# Altium PCB klor1_4.PcbDoc (part 3 of 3)
Units mm, origin at the board's own origin, x right, y up, seen from the top; angles counter-clockwise.
Board outline 323.11 x 118.19 mm, 2 copper layers (Top Layer, Bottom Layer); 176 components, 136 nets, 856 pads, 194 vias.
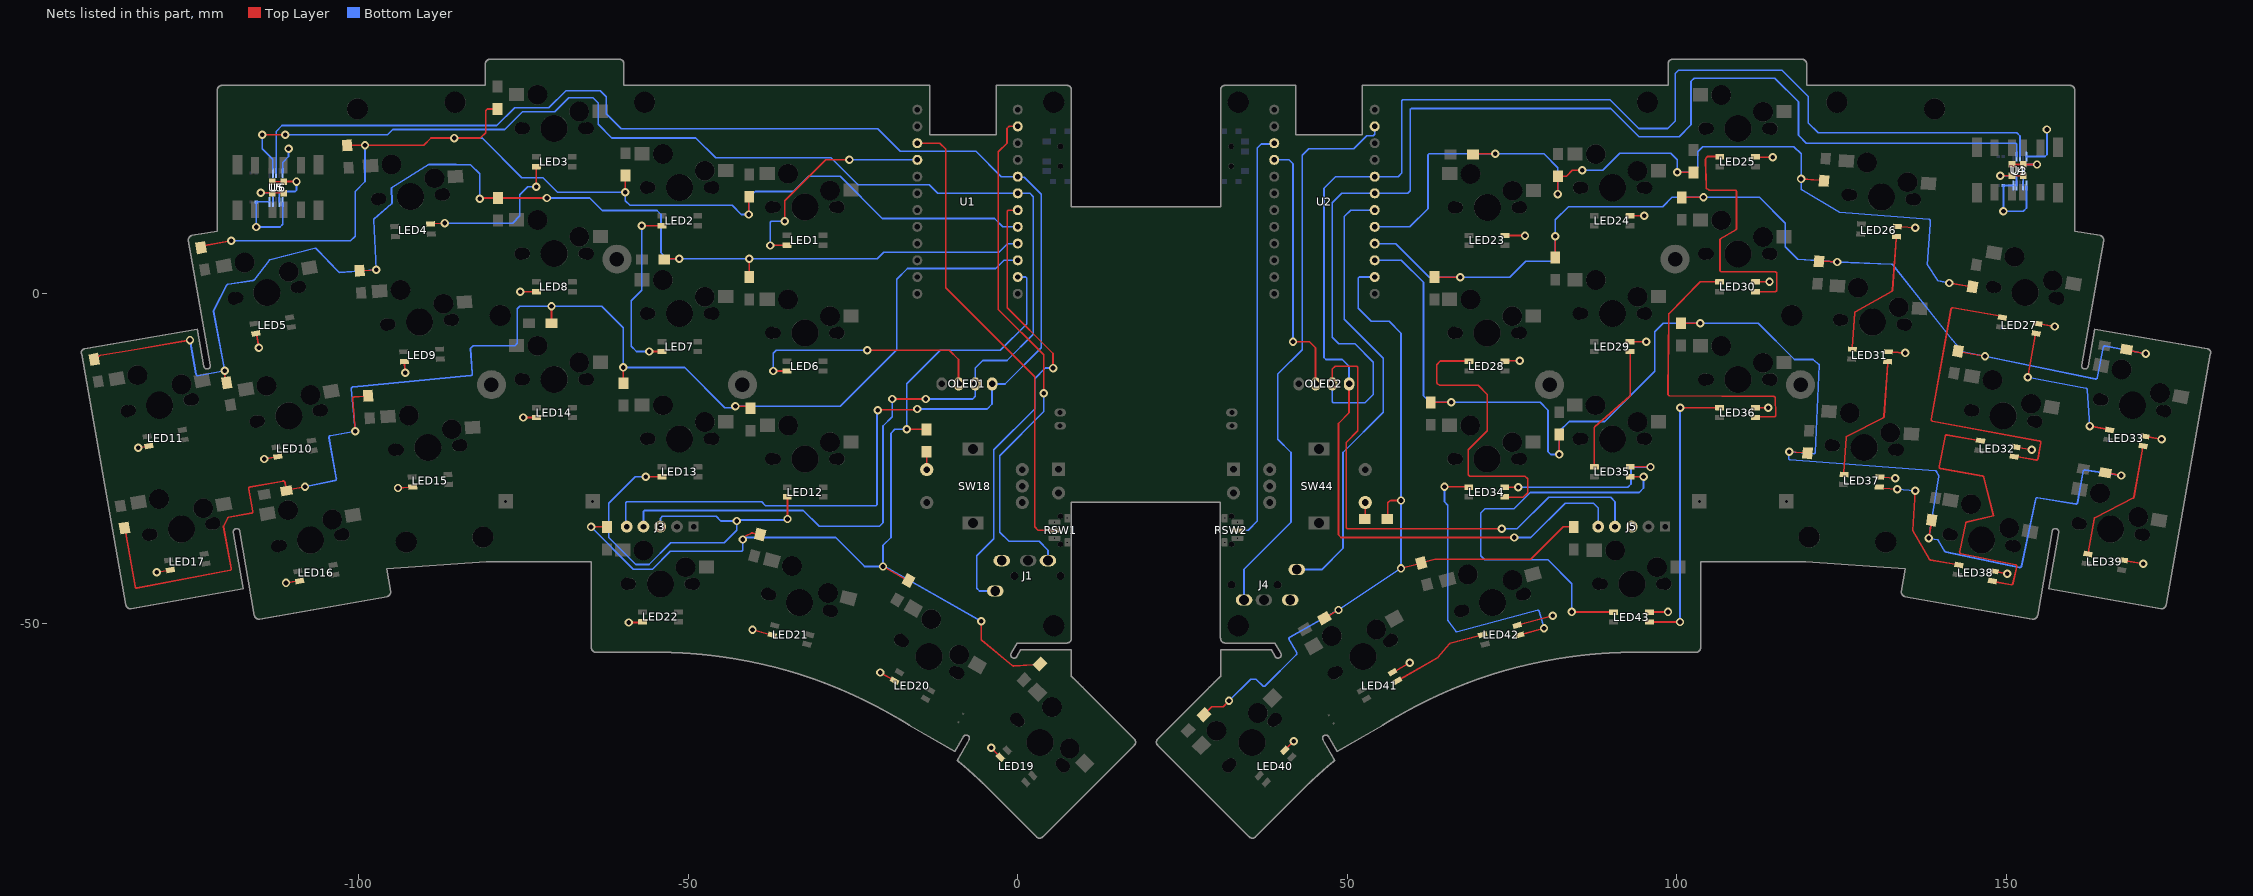
[diagram p3: the nets of this part, all layers, seen from the top]

## Via types
v1: diameter 1.27, hole 0.711, Top Layer to Bottom Layer, 194 vias

## Nets (pads, with @x,y where several pads share a name; then routed paths per layer and width w, separated by ;. In a path a pad name is that pad's centre, name@x,y a point inside that pad or via, vN(x,y) a via of type N, cw(c..) or ccw(c..) an arc to the next point about the centre after c; other vN are vias at no path point) (continued)
NetLED25_3: LED25.3 LED30.1 | length 39.6
  Top Layer w0.254: LED25.3@106.518,20.807 105.97,20.83 104.717,20.83 ccw(c104.717,20.576) 104.49,20.69 104.36,20.43 104.462,16.128 104.465,16.026 104.562,15.929 104.862,15.762 104.92,15.73 108.806,15.73 cw(c108.806,15.476) 109.06,15.477 ; 109.06,15.476 109.06,9.914 109.06,9.808 108.963,9.712 106.657,8.328 106.634,8.306 106.56,8.231 106.56,3.584 ccw(c106.814,3.584) 106.814,3.33 114.906,3.33 cw(c114.906,3.076) 115.16,3.076 115.16,0.584 cw(c114.906,0.584) 114.906,0.33 112.502,0.33 LED30.1@111.954,0.302
NetLED26_1: LED26.1 LED31.3 | length 20.5
  Top Layer w0.254: LED31.3@126.645,-8.411 126.643,-8.127 127.008,-2.909 127.015,-2.815 127.107,-2.723 132.629,0.377 132.654,0.402 ; 132.654,0.402 132.721,0.469 132.727,0.564 133.276,8.413 LED26.1@133.337,8.693
NetLED27_1: LED27.1 LED33.3 | length 24.7
  Top Layer w0.254: v1(153.26,-12.67) 154.387,-6.28 LED27.1@154.509,-6.014 ; v1(162.66,-20.07) 165.135,-20.506 LED33.3@165.663,-20.67
  Bottom Layer w0.254: v1(153.26,-12.67) 162.067,-14.334 cw(c162.02,-14.583) 162.274,-14.565 v1(162.66,-20.07)
NetLED27_3: LED27.3 LED32.1 | length 48.5
  Top Layer w0.254: 138.807,-19.316 cw(c138.855,-19.066) 138.605,-19.021 141.614,-2.324 cw(c141.864,-2.369) 141.908,-2.119 148.889,-3.35 LED27.3@149.403,-3.59 ; 138.808,-19.316 155.013,-22.324 cw(c154.967,-22.574) 155.218,-22.616 ; LED32.1@151.186,-24.712 151.738,-24.737 154.509,-25.226 ; 154.51,-25.226 ccw(c154.553,-24.976) 154.803,-25.019 155.217,-22.617
NetLED28_3: LED28.3 LED34.1 | length 44.8
  Top Layer w0.254: 63.569,-11.17 63.569,-10.761 64.122,-10.208 LED28.3@68.455,-10.208 ; 63.569,-11.165 63.587,-13.448 ccw(c63.841,-13.446) 63.689,-13.649 63.985,-13.87 69.86,-13.87 71.26,-15.27 71.26,-20.77 68.36,-23.67 68.36,-27.47 68.56,-27.67 76.96,-27.67 77.36,-28.07 77.36,-30.17 76.66,-30.87 74.436,-30.87 LED34.1@73.888,-30.823
NetLED29_1: LED29.1 LED35.3 | length 20
  Top Layer w0.254: LED35.3@87.485,-26.245 87.46,-25.962 87.46,-20.385 cw(c87.714,-20.385) 87.547,-20.194 92.872,-15.547 ; 92.873,-15.546 ccw(c92.705,-15.355) 92.959,-15.355 92.959,-9.036 LED29.1@92.918,-8.753
NetLED30_3: LED30.3 LED36.1 | length 44.3
  Top Layer w0.254: LED30.3@106.504,1.802 105.956,1.829 103.666,1.829 ccw(c103.666,1.575) 103.485,1.753 98.832,-2.997 ccw(c99.013,-3.175) 98.759,-3.172 98.662,-15.216 ccw(c98.916,-15.218) 98.914,-15.472 114.69,-15.571 114.794,-15.571 114.94,-15.717 114.996,-18.413 cw(c114.742,-18.416) 114.996,-18.416 114.996,-18.521 114.922,-18.596 114.847,-18.67 112.502,-18.67 LED36.1@111.954,-18.771
NetLED31_1: LED31.1 LED37.3 | length 20.7
  Top Layer w0.254: LED37.3@125.385,-27.441 125.349,-27.155 125.722,-21.806 125.729,-21.712 125.825,-21.616 131.339,-18.81 131.435,-18.715 131.442,-18.62 132.004,-10.573 LED31.1@131.977,-10.287
NetLED32_3: LED32.3 LED38.1 | length 47.4
  Top Layer w0.254: 140.014,-26.515 cw(c140.059,-26.265) 139.81,-26.216 140.712,-21.614 ; 140.015,-26.515 146.398,-27.641 cw(c146.354,-27.892) 146.6,-27.83 148.06,-33.67 144.016,-34.633 ccw(c144.075,-34.88) 143.827,-34.826 ; 140.712,-21.613 cw(c140.961,-21.663) 141.006,-21.412 145.537,-22.211 LED32.3@146.08,-22.288 ; 143.11,-39.421 cw(c143.162,-39.172) 142.913,-39.12 143.827,-34.827 ; 143.111,-39.421 151.404,-41.118 cw(c151.353,-41.367) 151.601,-41.423 ; LED38.1@147.899,-43.574 148.429,-43.724 150.723,-44.128 ccw(c150.767,-43.878) 151.015,-43.936 151.601,-41.424
NetLED33_1: LED33.1 LED39.3 | length 20.2
  Top Layer w0.254: LED39.3@162.383,-39.47 162.451,-39.195 163.339,-34.157 163.353,-34.078 163.437,-33.993 169.285,-30.972 169.369,-30.888 169.383,-30.809 170.695,-23.368 LED33.1@170.769,-23.094
NetLED34_3: LED34.3 LED42.1 | length 45.9
  Top Layer w0.254: v1(64.76,-29.27) 64.786,-29.296 68.412,-29.296 LED34.3@68.438,-29.323 ; LED42.1@76.179,-51.755 76.708,-51.614 v1(79.86,-50.77)
  Bottom Layer w0.254: v1(64.76,-29.27) 64.76,-31.57 65.26,-32.07 65.26,-49.487 ccw(c65.514,-49.487) 65.309,-49.637 66.437,-51.175 66.448,-51.19 66.536,-51.279 66.675,-51.279 78.831,-47.998 78.97,-47.998 79.044,-48.073 79.09,-48.119 79.109,-48.182 v1(79.86,-50.77)
NetLED35_1: LED35.1 LED43.3 | length 62.7
  Top Layer w0.254: v1(84.06,-48.27) 84.071,-48.281 90.407,-48.281 LED43.3@90.418,-48.293 ; LED35.1@92.935,-27.745 93.483,-27.77 v1(94.96,-27.77)
  Bottom Layer w0.254: v1(84.06,-48.27) 84.06,-43.97 80.46,-40.37 70.86,-40.37 70.26,-39.77 70.26,-33.27 70.91,-32.62 75.31,-32.62 77.781,-30.149 94.281,-30.149 94.96,-29.47 v1(94.96,-27.77)
NetLED36_3: LED36.3 LED43.1 | length 43.1
  Top Layer w0.254: LED43.1@95.868,-49.793 v1(100.483,-49.793) ; v1(100.505,-17.271) LED36.3@106.504,-17.271
  Bottom Layer w0.254: v1(100.483,-49.793) 100.483,-17.293 v1(100.505,-17.271)
NetLED37_1: LED37.1 LED38.3 | length 21.2
  Top Layer w0.254: LED37.1@130.717,-29.317 131.252,-29.516 v1(133.46,-29.67) ; v1(136.16,-29.87) 135.799,-35.938 138.301,-40.267 ccw(c138.521,-40.14) 138.476,-40.39 ; 138.477,-40.391 142.253,-41.056 LED38.3@142.793,-41.15
  Bottom Layer w0.254: v1(133.46,-29.67) v1(136.16,-29.87)
NetLED41_1: LED41.1 LED42.3 | length 15
  Top Layer w0.254: LED41.1@57.625,-58.722 58.1,-58.448 63.706,-55.212 63.736,-55.181 63.743,-55.174 65.515,-53.106 65.521,-53.099 65.576,-53.043 69.997,-51.859 LED42.3@70.526,-51.717
NetU3_7: U3.7 U4.1 U4.2 | length 8.9
  Top Layer w0.254: U4.2@150.86,19.63 U4.1@152.56,19.63 ; U4.1@152.56,19.63 v1(154.66,19.63)
  Bottom Layer w0.254: U3.7@152.56,16.43 152.56,17.02 152.568,17.028 152.568,19.238 152.96,19.63 v1(154.66,19.63)
NetU3_9: U3.9 U4.3 U4.4 | length 7.4
  Top Layer w0.254: v1(149.06,17.93) U4.3@150.86,17.93 U4.4@152.56,17.93
  Bottom Layer w0.254: v1(149.06,17.93) 151.36,17.93 151.544,17.746 151.544,16.446 U3.9@151.56,16.43
NetU5_7: U5.7 U6.1 U6.2 | length 9.2
  Top Layer w0.254: U6.2@-113.111,17.018 -111.411,17.018 -111.399,17.03 v1(-109.44,17.03)
  Bottom Layer w0.254: U5.7@-112.04,13.93 -112.04,14.52 -112.032,14.528 -112.032,15.381 -111.883,15.53 -109.64,15.53 -109.44,15.73 v1(-109.44,17.03)
NetU5_9: U5.9 U6.3 U6.4 | length 6.5
  Top Layer w0.254: v1(-114.84,15.33) -113.123,15.33 -113.111,15.318 U6.4@-111.411,15.318
  Bottom Layer w0.254: v1(-114.84,15.33) -113.205,15.33 -113.056,15.181 -113.056,14.528 -113.04,14.512 U5.9@-113.04,13.93
RESET: RSW1.2 U1.22 | length 70.8
  Top Layer w0.254: U1.22@-15.24,22.86 -11.84,22.86 -10.94,21.96 -10.94,0.93 2.56,-12.57 2.56,-35.37 3.07,-35.88 RSW1.2@5.57,-35.88
RESET_L: RSW2.2 U2.22 | length 63.1
  Bottom Layer w0.254: RSW2.2@33.35,-35.88 34.95,-35.88 36.36,-34.47 36.36,22.13 36.951,22.721 38.781,22.721 U2.22@38.92,22.86
row0: D1.1 D2.1 D3.1 D4.1 D5.1 U1.8 | length 168.9
  Top Layer w0.254: D5.1@-123.935,7.004 -123.359,7.321 v1(-119.34,8.03) ; D4.1@-101.759,22.526 v1(-99.04,22.526) -90.144,22.526 -89.04,23.63 v1(-85.492,23.63) -81.54,23.63 -80.74,24.43 -80.74,27.771 -80.481,28.03 D3.1@-78.94,28.03 ; v1(-59.54,15.43) D2.1@-59.54,17.93 ; v1(-40.84,12.03) -40.84,14.63 D1.1@-40.74,14.73
  Bottom Layer w0.254: v1@-119.64,8.03 -101.24,8.03 -100.54,8.73 -100.54,15.53 -99.04,17.03 v1(-99.04,22.526) ; v1(-85.492,23.63) -81.24,23.63 -75.24,17.63 -72.04,17.63 -69.84,15.43 v1(-59.54,15.43) -59.54,14.13 -58.84,13.43 -43.34,13.43 -41.94,12.03 v1(-40.84,12.03) -40.84,14.53 -39.84,15.53 -34.04,15.53 -31.74,17.83 -26.94,17.83 -20.54,11.43 -3.54,11.43 -2.27,10.16 U1.8@0,10.16
row0_L: D23.1 D24.1 D25.1 D26.1 D27.1 U2.8 | length 139.2
  Top Layer w0.254: D23.1@69.06,21.13 69.833,21.23 v1(72.46,21.23) ; v1(81.96,15.13) D24.1@81.96,17.83 83.26,17.83 84.16,18.73 v1(85.66,18.73) ; v1(100.06,18.43) D25.1@102.56,18.43 ; v1(118.86,17.43) 121.724,17.23 D26.1@122.341,17.134 ; v1(141.36,1.63) 144.244,1.122 D27.1@144.865,1.056
  Bottom Layer w0.254: U2.8@54.16,10.16 59.49,10.16 62.26,12.93 62.26,21.081 62.409,21.23 v1(72.46,21.23) 79.86,21.23 81.96,19.13 v1(81.96,15.13) ; v1(85.66,18.73) 88.76,18.73 91.36,21.33 99.06,21.33 100.06,20.33 v1(100.06,18.43) 102.36,18.43 103.16,19.23 103.16,21.53 103.96,22.33 117.76,22.33 118.86,21.23 v1(118.86,17.43) 118.861,15.835 ; 118.861,15.83 124.657,12.395 138.313,11.312 138.453,11.171 138.453,11.064 138.453,11.062 138.45,10.83 138.447,10.652 138.447,10.643 138.447,10.634 138.019,4.439 ; 138.019,4.433 139.618,2 v1(141.36,1.63)
row1: D6.1 D7.1 D8.1 D9.1 D10.1 D11.1 U1.9 | length 196.3
  Top Layer w0.254: D11.1@-140.126,-9.947 -139.557,-9.585 -139.16,-9.331 -134.038,-8.507 -126.44,-7.17 v1(-125.59,-7.02) ; v1@-120.475,-11.614 -120.274,-12.753 D10.1@-120.035,-13.496 ; D9.1@-99.859,3.526 -99.232,3.498 v1(-97.34,3.63) ; v1(-81.64,14.43) -81.54,14.53 D8.1@-78.84,14.53 v1(-71.44,14.53) ; D7.1@-53.64,5.23 -53.54,5.33 v1(-51.34,5.33) ; D6.1@-40.74,2.53 v1(-40.74,5.33)
  Bottom Layer w0.254: v1(-125.59,-7.02) -124.684,-12.217 ccw(c-124.434,-12.173) -124.388,-12.423 v1(-120.34,-11.67) -122.024,-2.657 ; -122.024,-2.656 cw(c-121.774,-2.61) -121.999,-2.492 -120,1.316 ; -119.999,1.317 cw(c-119.775,1.198) -119.813,1.449 -116.041,2.015 ; -116.04,2.015 ccw(c-116.078,2.266) -115.878,2.111 -113.593,5.061 ; -113.593,5.062 cw(c-113.392,4.906) -113.456,5.152 -106.683,6.893 cw(c-106.619,6.647) -106.437,6.824 -102.94,3.23 v1(-97.34,3.63) -97.734,11.205 ; -97.734,11.206 cw(c-97.48,11.218) -97.645,11.411 -95.033,13.65 ; -95.033,13.65 ccw(c-95.199,13.843) -94.945,13.853 -95.034,16.088 -89.34,19.63 -85.24,19.63 -83.039,19.595 -81.64,18.196 v1(-81.64,14.43) ; v1(-71.44,14.53) -64.94,14.53 -63.04,12.63 -54.74,12.63 -54.14,12.03 -54.14,6.23 -53.24,5.33 v1(-51.34,5.33) v1(-40.74,5.33) -21.34,5.33 -20.34,6.33 -2.84,6.33 -1.55,7.62 U1.9@0,7.62
row1_L: D28.1 D29.1 D30.1 D31.1 D32.1 D33.1 U2.9 | length 164.8
  Top Layer w0.254: D28.1@63.26,2.53 v1(67.16,2.53) ; D29.1@81.56,5.53 v1(81.56,8.73) ; D30.1@100.76,14.63 v1(104.06,14.63) ; D31.1@121.579,4.926 122.207,4.981 v1(124.36,4.83) ; D32.1@142.655,-8.696 143.26,-8.853 v1(146.76,-9.47) ; D33.1@168.234,-8.465 168.98,-8.686 v1(171.16,-9.07)
  Bottom Layer w0.254: U2.9@54.16,7.62 57.37,7.62 62.46,2.53 v1(67.16,2.53) 74.66,2.53 77.06,4.93 81.011,4.93 81.56,5.479 v1(81.56,8.73) 81.56,11.23 83.56,13.23 97.86,13.23 99.26,14.63 v1(104.06,14.63) 112.56,14.63 116.46,10.73 116.46,7.13 118.36,5.23 v1(124.36,4.83) 132.576,4.505 132.676,4.501 132.756,4.42 141.759,-6.917 141.763,-6.921 143.375,-8.793 v1(146.76,-9.47) 163.534,-12.924 163.665,-12.924 163.794,-12.794 163.809,-12.718 164.712,-8.117 cw(c164.961,-8.166) 165.007,-7.916 v1(171.16,-9.07)
row2: D12.1 D13.1 D14.1 D15.1 D16.1 D17.1 U1.10 | length 223.5
  Top Layer w0.254: D17.1@-135.545,-35.544 -135.358,-36.296 -133.924,-44.425 -133.91,-44.504 -133.779,-44.635 -133.65,-44.635 -119.54,-41.96 -119.463,-41.946 -119.333,-41.816 -119.333,-41.687 -120.516,-35.342 -120.516,-35.257 -120.488,-35.201 -119.863,-34.001 -119.845,-33.966 -119.76,-33.882 -116.195,-33.263 -116.064,-33.131 -116.064,-33.003 -116.068,-32.98 -116.693,-29.621 ; -116.694,-29.62 cw(c-116.444,-29.574) -116.489,-29.324 -111.49,-28.415 ; -111.489,-28.415 cw(c-111.444,-28.665) -111.194,-28.621 -111.081,-29.263 D16.1@-110.966,-29.875 -110.223,-29.637 v1(-108.14,-29.27) ; v1(-100.54,-20.87) -100.921,-15.922 cw(c-100.667,-15.902) -100.685,-15.649 -99.178,-15.544 D15.1@-98.559,-15.474 ; D14.1@-70.74,-4.47 v1(-70.74,-1.87) ; D13.1@-59.84,-13.57 v1(-59.84,-11.17) ; v1(-42.84,-17.07) -40.84,-17.07 D12.1@-40.54,-17.37
  Bottom Layer w0.254: v1(-108.14,-29.27) -103.582,-28.32 ; -103.581,-28.32 ccw(c-103.634,-28.072) -103.384,-28.027 -104.495,-21.821 cw(c-104.245,-21.776) -104.289,-21.526 v1(-100.54,-20.87) -101.118,-14.421 cw(c-100.865,-14.398) -100.889,-14.145 -82.987,-12.394 ; -82.986,-12.394 ccw(c-83.011,-12.141) -82.758,-12.123 -83.04,-8.27 -82.64,-7.87 -76.289,-7.87 -75.94,-7.521 -75.94,-2.27 -75.54,-1.87 v1(-70.74,-1.87) -63.14,-1.87 -59.84,-5.17 v1(-59.84,-11.17) -50.54,-11.17 -44.446,-17.264 -43.034,-17.264 v1(-42.84,-17.07) -26.94,-17.07 -18.34,-8.47 -18.34,2.23 -16.74,3.83 -3.34,3.83 -2.09,5.08 U1.10@0,5.08
row2_L: D34.1 D35.1 D36.1 D37.1 D38.1 D39.1 U2.10 | length 221.4
  Top Layer w0.254: D34.1@62.66,-16.47 63.283,-16.47 v1(65.76,-16.47) ; v1(82.16,-24.37) D35.1@82.16,-21.37 ; D36.1@100.66,-4.47 v1(103.56,-4.47) ; v1(117.06,-23.97) 119.22,-24.121 D37.1@119.841,-24.166 ; v1(138.226,-37.064) 138.57,-35.112 D38.1@138.665,-34.344 ; D39.1@165.034,-27.165 165.799,-27.277 v1(167.46,-27.57)
  Bottom Layer w0.254: U2.10@54.16,5.08 58.21,5.08 61.56,1.73 61.56,-15.47 62.56,-16.47 v1(65.76,-16.47) 79.26,-16.47 80.46,-17.67 80.46,-23.97 80.86,-24.37 v1(82.16,-24.37) 82.16,-20.87 83.66,-19.37 89.06,-19.37 96.66,-11.77 96.66,-5.77 97.96,-4.47 v1(103.56,-4.47) 112.36,-4.47 117.86,-9.97 120.66,-9.97 121.621,-10.773 ; 121.621,-10.767 121.007,-24.127 120.937,-24.197 120.863,-24.271 120.758,-24.271 120.747,-24.271 120.737,-24.27 v1(117.06,-23.97) 117.003,-24.945 117.003,-25.058 117.144,-25.199 139.216,-26.865 139.31,-26.872 139.402,-26.964 139.747,-27.597 139.747,-27.661 139.747,-27.682 139.744,-27.702 v1@138.218,-37.001 ; v1(138.226,-37.064) 139.512,-37.32 139.587,-37.335 139.663,-37.411 140.682,-39.082 140.756,-39.157 140.83,-39.172 152.012,-41.518 ccw(c152.064,-41.269) 152.312,-41.322 154.46,-31.144 154.476,-31.07 154.603,-30.942 154.729,-30.942 160.531,-31.893 160.551,-31.893 160.657,-31.893 160.731,-31.819 160.787,-31.762 160.801,-31.684 161.67,-26.856 161.801,-26.726 161.926,-26.726 161.945,-26.729 v1(167.46,-27.57)
row3: D18.1 D19.1 D20.1 D21.1 D22.1 U1.11 | length 155.7
  Top Layer w0.254: v1(-64.74,-35.37) D22.1@-62.34,-35.37 ; v1(-41.74,-37.286) -41.74,-36.97 -40.426,-36.313 cw(c-40.313,-36.54) -40.248,-36.295 -39.72,-36.436 D21.1@-39.1,-36.528 ; v1(-20.44,-41.37) -17.171,-43.258 D20.1@-16.59,-43.498 ; v1(-16.84,-20.57) D18.1@-13.84,-20.57 ; v1(-5.54,-49.67) -5.54,-52.501 -5.447,-52.593 -0.819,-56.405 ccw(c-0.657,-56.209) -0.657,-56.463 ccw(c-0.657,-56.209) -0.641,-56.463 2.375,-56.274 D19.1@3.362,-56.168
  Bottom Layer w0.254: v1(-64.74,-35.37) -58.34,-41.77 -55.432,-41.77 -52.732,-39.07 -41.889,-39.07 -41.74,-38.921 v1(-41.74,-37.286) -41.74,-36.97 -27.64,-36.97 -23.24,-41.37 v1(-20.44,-41.37) ; v1(-5.54,-49.67) -20.23,-41.37 v1(-20.44,-41.37) ; U1.11@0,2.54 1.203,2.54 1.352,2.391 1.352,-4.57 -2.648,-8.57 -11.74,-8.57 -16.84,-13.67 v1(-16.84,-20.57) -18.64,-20.57 -19.24,-21.17 -19.24,-36.97 -20.44,-38.17 v1(-20.44,-41.37)
row3_L: D40.1 D41.1 D42.1 D43.1 D44.1 U2.11 | length 128
  Top Layer w0.254: D40.1@28.262,-63.868 29.46,-62.67 31.16,-62.67 v1(32.06,-61.77) ; D41.1@46.532,-49.22 47.192,-48.817 v1(48.66,-47.97) ; D44.1@56.06,-34.17 56.155,-33.547 56.155,-31.801 cw(c56.409,-31.801) 56.256,-31.598 ; 56.257,-31.598 56.492,-31.421 cw(c56.645,-31.624) 56.645,-31.37 v1(58.16,-31.37) ; v1(58.16,-41.67) 60.624,-41.01 D42.1@61.22,-40.828 61.822,-40.667 63.302,-40.27 77.86,-40.27 82.76,-35.37 D43.1@84.36,-35.37
  Bottom Layer w0.254: v1(32.06,-61.77) 35.36,-58.47 36.16,-58.47 37.255,-59.565 37.465,-59.565 42.292,-54.738 42.332,-54.698 42.332,-54.431 41.146,-52.381 41.146,-52.208 41.245,-52.109 41.276,-52.091 v1(48.66,-47.97) v1(58.16,-41.67) v1(58.16,-31.37) 58.16,-5.97 56.36,-4.17 53.66,-4.17 51.67,-2.18 51.67,2.391 51.819,2.54 U2.11@54.16,2.54
RX: J1.3 U1.7 | length 70.2
  Top Layer w0.254: U1.7@0,12.7 -1.421,12.7 -1.57,12.551 -1.57,-2.14 5.36,-9.07 v1(5.36,-11.27)
  Bottom Layer w0.254: J1.3@-3.42,-45.095 -5.815,-45.095 -6.215,-44.695 -6.215,-39.745 -3.64,-37.17 -3.64,-23.67 2.56,-17.47 2.56,-12.87 4.16,-11.27 v1(5.36,-11.27)
RX_L: J4.3 U2.7 | length 68.7
  Bottom Layer w0.254: J4.3@42.34,-41.845 46.136,-41.845 49.36,-38.621 49.36,-24.07 55.46,-17.97 55.46,-9.77 49.56,-3.87 49.56,11.73 50.53,12.7 U2.7@54.16,12.7
SCL: J3.4 OLED1.3 U1.6 U5.2 | length 241.5
  Top Layer w0.254: v1(-114.64,24.13) v1(-111.14,24.13) ; v1(-19.04,-15.97) v1(-13.94,-15.97)
  Bottom Layer w0.254: v1(-114.64,24.13) -114.54,24.03 -114.624,23.946 -114.624,22.014 -113.04,20.43 U5.2@-113.04,18.931 ; v1(-111.14,24.13) -95.64,24.13 -94.84,24.93 -77.84,24.93 -75.14,27.63 -70.24,27.63 -68.14,29.73 -64.44,29.73 -63.674,28.964 -63.674,25.712 -61.591,23.63 -48.84,23.63 -45.84,20.63 -28.34,20.63 -24.24,16.53 -13.44,16.53 -12.15,15.24 U1.6@0,15.24 1.85,15.24 2.36,14.73 2.36,-6.121 -1.638,-10.12 -5.29,-10.12 -6.439,-11.269 OLED1.3@-6.439,-13.675 -6.439,-15.569 -6.84,-15.97 v1(-13.94,-15.97) ; J3.4@-56.79,-35.32 -56.79,-33.018 -56.641,-32.869 -32.541,-32.869 -30.14,-35.27 -20.989,-35.27 -20.44,-34.721 -20.44,-20.07 -19.04,-18.67 v1(-19.04,-15.97)
SCL_L: J5.4 OLED2.3 U2.6 U3.2 | length 256.2
  Top Layer w0.254: OLED2.3@47.729,-13.675 47.729,-11.401 48.155,-10.975 51.416,-10.975 51.565,-11.124 51.565,-20.765 49.86,-22.57 49.86,-35.521 50.009,-35.67 v1(73.46,-35.67)
  Bottom Layer w0.254: OLED2.3@47.729,-13.675 47.729,-16.39 47.878,-16.539 52.691,-16.539 53.96,-15.27 53.96,-10.37 51.16,-7.57 48.729,-7.57 47.729,-6.57 47.729,13.799 49.17,15.24 U2.6@54.16,15.24 59.17,15.24 59.56,15.63 59.56,27.981 59.709,28.13 89.96,28.13 94.26,23.83 100.36,23.83 102.16,25.63 102.16,32.23 102.66,32.73 114.86,32.73 118.46,29.13 118.46,24.038 119.66,22.838 151.411,22.838 151.56,22.689 U3.2@151.56,20.83 ; v1(73.46,-35.67) 75.76,-35.67 80.56,-30.87 89.96,-30.87 90.62,-31.53 J5.4@90.62,-35.32
SDA: J3.5 OLED1.4 U1.5 U5.3 | length 243.3
  Top Layer w0.254: v1(-21.24,-17.67) -21.145,-17.575 -15.336,-17.575 v1(-15.241,-17.481)
  Bottom Layer w0.254: U5.3@-112.54,18.33 -112.532,18.338 -112.532,24.638 -111.64,25.53 -109.04,25.53 -79.04,25.53 -76.34,28.23 -71.14,28.23 -68.545,30.825 -63.34,30.825 -62.44,29.925 -62.44,27.33 -60.14,25.03 -21.24,25.03 -17.84,21.63 -6.34,21.63 -2.49,17.78 U1.5@0,17.78 0.084,17.696 0.994,17.696 3.56,15.13 3.56,-8.17 -1.945,-13.675 OLED1.4@-3.899,-13.675 -3.899,-16.729 -4.64,-17.47 -15.231,-17.47 v1(-15.241,-17.481) ; J3.5@-59.33,-35.32 -59.485,-35.165 -59.485,-31.719 -59.336,-31.57 -38.84,-31.57 -38.264,-32.146 -21.516,-32.146 -21.348,-31.978 -21.348,-17.778 v1(-21.24,-17.67)
SDA_L: J5.5 OLED2.4 U2.5 U3.3 | length 238
  Top Layer w0.254: OLED2.4@50.269,-13.675 50.269,-18.061 48.66,-19.67 48.66,-36.57 49.06,-36.97 v1(75.323,-36.97)
  Bottom Layer w0.254: OLED2.4@50.269,-13.675 50.269,-10.979 49.26,-9.97 46.76,-9.97 46.46,-9.67 46.46,16.03 48.21,17.78 U2.5@54.16,17.78 57.71,17.78 58.26,18.33 58.26,29.281 58.409,29.43 89.86,29.43 94.21,25.08 98.61,25.08 99.76,26.23 99.76,33.43 100.26,33.93 115.96,33.93 119.96,29.93 119.96,25.93 121.46,24.43 151.582,24.43 152.068,23.944 U3.3@152.068,20.83 ; v1(75.323,-36.97) 77.86,-36.97 83.06,-31.77 87.36,-31.77 88.08,-32.49 J5.5@88.08,-35.32
SW18B: D18.2 SW18.S2 | length 2.7
  Top Layer w0.254: D18.2@-13.84,-23.97 -13.81,-24.743 SW18.S2@-13.81,-26.67
SW18B_L: D44.2 SW44.S2 | length 2.5
  Top Layer w0.254: D44.2@52.66,-34.17 52.73,-33.547 SW44.S2@52.73,-31.67
TX: J1.4 U1.2 | length 79.2
  Top Layer w0.254: U1.2@0,25.4 -1.31,25.4 -1.64,25.07 -1.64,22.83 -2.94,21.53 -2.94,-2.37 3.96,-9.27 v1(3.96,-15.07)
  Bottom Layer w0.254: v1(3.96,-15.07) 3.96,-17.87 -2.74,-24.57 -2.74,-36.17 -1.34,-37.57 3.26,-37.57 4.58,-38.89 J1.4@4.58,-40.495
TX_L: J4.4 U2.2 | length 86.3
  Bottom Layer w0.254: J4.4@34.34,-46.445 34.34,-41.79 41.46,-34.67 41.46,-24.07 39.46,-22.07 39.46,-12.17 43.16,-8.47 43.16,21.03 44.16,22.03 50.96,22.03 52.933,24.003 53.933,24.003 54.16,24.23 U2.2@54.16,25.4
VCC: C4.1 J1.1 J3.3 LED1.4 LED2.4 LED3.4 LED4.4 LED5.4 LED6.4 LED7.4 LED8.4 LED9.4 LED10.4 LED11.4 LED12.4 LED13.4 LED14.4 LED15.4 LED16.4 LED17.4 LED19.4 LED20.4 LED21.4 LED22.4 OLED1.2 U1.21 U5.5 U5.6 U5.10 | length 231.3
  Top Layer w0.254: v1(-133.44,-23.37) -132.39,-23.185 LED11.4@-131.849,-23.094 ; v1(-130.64,-42.27) -129.107,-42 LED17.4@-128.569,-41.894 ; LED5.4@-115.589,-6.014 -115.473,-6.281 v1(-115.14,-8.17) ; v1(-114.34,-25.07) -112.807,-24.8 LED10.4@-112.266,-24.712 ; v1(-111.04,-43.87) -109.531,-43.604 LED16.4@-108.979,-43.574 ; v1(-94.04,-29.47) -92.344,-29.351 LED15.4@-91.797,-29.317 ; LED9.4@-93.057,-10.287 -93.038,-10.57 v1(-92.94,-11.97) ; LED4.4@-89.085,10.569 -88.539,10.618 v1(-86.94,10.73) ; v1(-75.468,0.302) LED8.4@-73.034,0.302 ; v1(-75.039,-18.771) LED14.4@-73.034,-18.771 ; LED3.4@-73.048,19.307 -73.04,19.299 v1(-73.04,16.23) ; v1(-59.04,-49.87) -57.47,-49.87 LED22.4@-56.922,-49.78 ; v1(-57.04,10.33) -57.039,10.329 -54.009,10.329 LED2.4@-54.008,10.327 ; v1@-56.44,-27.77 LED13.4@-53.984,-27.771 ; v1(-55.923,-8.753) LED7.4@-53.998,-8.753 ; v1(-40.24,-50.97) -37.779,-51.629 LED21.4@-37.248,-51.766 ; v1(-37.54,7.33) -37.512,7.358 -35.015,7.358 LED1.4@-34.987,7.386 ; v1(-37.102,-11.708) LED6.4@-34.985,-11.708 ; v1(-35.34,11.03) -35.34,14.13 -29.14,20.33 v1(-25.54,20.33) ; LED12.4@-34.968,-30.823 -34.94,-30.851 v1(-34.94,-34.17) ; v1(-22.84,-8.57) -10.379,-8.57 -8.979,-9.97 OLED1.2@-8.979,-13.675 ; v1(-20.84,-57.47) -20.341,-57.769 ccw(c-20.211,-57.551) -20.338,-57.771 -19.176,-58.442 LED20.4@-18.705,-58.722 ; v1(-4.04,-68.87) -3.011,-69.899 LED19.4@-2.63,-70.292
  Bottom Layer w0.254: U5.10@-113.56,13.968 -115.502,13.968 C4.1@-115.54,13.93 -115.54,10.63 v1(-115.54,10.13) -111.94,10.13 -111.54,10.53 U5.6@-111.54,13.83 ; U5.5@-111.54,18.33 -111.54,19.93 -110.64,20.83 v1(-110.64,22.03) ; v1(-86.94,10.73) -76.64,10.73 -75.54,11.83 -75.54,15.03 -74.34,16.23 v1(-73.04,16.23) ; v1(-57.04,10.33) -57.04,0.53 -58.64,-1.07 -58.64,-7.97 -57.857,-8.753 v1(-55.923,-8.753) ; v1(-56.44,-27.77) -58.04,-27.77 -62.04,-31.77 -62.04,-36.97 -57.94,-41.07 -55.94,-41.07 -52.64,-37.77 -44.54,-37.77 -42.64,-35.87 v1(-42.64,-34.47) ; J3.3@-54.25,-35.32 -54.209,-35.279 -54.209,-34.039 -53.94,-33.77 -45.74,-33.77 -45.04,-34.47 v1(-42.64,-34.47) ; v1(-37.54,7.33) -37.54,10.881 -37.391,11.03 v1(-35.34,11.03) ; v1(-37.102,-11.708) -37.102,-9.032 -36.64,-8.57 v1(-22.84,-8.57) ; v1(-34.94,-34.17) -35.09,-34.32 -42.49,-34.32 v1(-42.64,-34.47) ; v1(-25.54,20.33) -25.53,20.32 U1.21@-15.24,20.32
VCC_L: C2.1 J4.1 J5.3 LED23.4 LED24.4 LED25.4 LED26.4 LED27.4 LED28.4 LED29.4 LED30.4 LED31.4 LED32.4 LED33.4 LED34.4 LED35.4 LED36.4 LED37.4 LED38.4 LED39.4 LED40.4 LED41.4 LED42.4 LED43.4 OLED2.2 U2.21 U3.5 U3.6 U3.10 | length 136.8
  Top Layer w0.254: LED40.4@40.489,-69.231 40.881,-68.849 v1(41.86,-67.87) ; v1(41.76,-7.27) 44.26,-7.27 45.189,-8.199 OLED2.2@45.189,-13.675 ; LED41.4@56.875,-57.423 57.367,-57.179 v1(59.46,-55.97) ; LED34.4@73.888,-29.323 73.912,-29.346 75.936,-29.346 v1(75.96,-29.37) ; LED28.4@73.905,-10.208 74.453,-10.17 v1(76.16,-10.17) ; LED23.4@73.928,8.847 73.937,8.839 76.951,8.839 v1(76.96,8.83) ; LED42.4@75.791,-50.307 76.321,-50.167 v1(81.16,-48.87) ; LED29.4@92.918,-7.253 92.927,-7.261 95.351,-7.261 v1(95.36,-7.27) ; LED24.4@92.928,11.827 93.476,11.83 v1(95.06,11.83) ; LED35.4@92.935,-26.245 95.985,-26.245 v1(96.01,-26.27) ; LED43.4@95.868,-48.293 96.416,-48.27 v1(98.66,-48.27) ; LED36.4@111.954,-17.271 112.502,-17.27 v1(113.86,-17.27) ; LED30.4@111.954,1.802 112.502,1.83 v1(114.06,1.83) ; LED25.4@111.968,20.807 112.516,20.73 v1(114.56,20.73) ; LED37.4@130.821,-27.821 131.369,-27.845 v1(133.16,-27.97) ; LED31.4@132.081,-8.791 132.628,-8.828 v1(134.66,-8.97) ; LED26.4@133.441,10.189 133.99,10.182 v1(136.16,10.03) ; LED38.4@148.16,-42.097 148.696,-42.212 v1(150.16,-42.47) ; LED32.4@151.447,-23.234 151.985,-23.339 v1(153.86,-23.67) ; LED27.4@154.77,-4.537 155.314,-4.609 v1(157.36,-4.97) ; LED39.4@167.75,-40.417 168.286,-40.534 v1(170.76,-40.97) ; LED33.4@171.03,-21.617 171.568,-21.719 v1(173.56,-22.07)
  Bottom Layer w0.254: U2.21@38.92,20.32 41.17,20.32 41.76,19.73 v1(41.76,-7.27) ; v1(75.96,-29.37) 92.56,-29.37 93.06,-28.87 93.06,-26.47 93.26,-26.27 v1(96.01,-26.27) ; U3.10@150.998,16.43 C2.1@149.56,16.43 v1(149.56,12.53) 152.56,12.53 153.06,13.03 U3.6@153.06,16.33 ; U3.5@153.06,20.83 155.86,20.83 156.16,21.13 v1(156.16,24.93)
pads on no net: J1.Un3 J1.Un4 J3.1 J4.Un3 J4.Un4 J5.1 LED17.1 LED39.1 MH1.Un1 MH2.Un1 MH3.Un1 MH4.Un1 MH5.Un1 MH6.Un1 MH7.Un1 MH8.Un1 MH10.Un1 MH11.Un1 MH12.Un1 MH13.Un1 MH14.Un1 MH15.Un1 MH16.Un1 MH17.Un1 PSW1. PSW1.1 PSW1.4_1 PSW1.4_2 PSW1.4_3 PSW1.4_4 PSW2. PSW2.1 PSW2.4_1 PSW2.4_2 PSW2.4_3 PSW2.4_4 RSW1.MP RSW1.Un1 RSW1.Un2 RSW2.MP RSW2.Un1 RSW2.Un2 SW1. SW2. SW3. SW4. SW5. SW6. SW7. SW8. SW9. SW10. SW11. SW12. SW13. SW14. SW15. SW16. SW17. SW18.MP SW19. SW20. SW21. SW22. SW23. SW24. SW25. SW26. SW27. SW28. SW29. SW30. SW31. SW32. SW33. SW34. SW35. SW36. SW37. SW38. SW39. SW40. SW41. SW42. SW43. SW44.MP TP1.1 TP2.1

## Polygon pours and split planes (outlines as drawn)
GND_R on Top Layer "F.Cu-" (solid, remove dead copper, pour order 2): -81.62,32.48 -122.47,32.605 -122.495,10.33 -127.17,9.53 -124.645,-4.37 -143.145,-7.67 -135.745,-48.945 -117.32,-45.47 -116.42,-50.495 -94.095,-46.395 -94.795,-42.52 -80.795,-41.42 -65.545,-41.47 -65.32,-55.395 -55.17,-55.37 -46.87,-55.72 -39.22,-57.02 -29.17,-60.12 -19.67,-64.645 -10.17,-70.37 -10.27,-70.92 3.23,-84.02 19.255,-67.87 7.871,-56.624 7.846,32.351 -3.795,32.305 -3.82,24.955 -12.47,24.93 -12.47,32.305 -59.02,32.455 -59.045,36.23 -81.595,36.23
GND_l on Top Layer "F.Cu-" (solid, remove dead copper, pour order 14): 120.54,32.48 161.39,32.605 161.415,10.33 166.09,9.53 163.565,-4.37 182.065,-7.67 174.665,-48.945 156.24,-45.47 155.34,-50.495 133.015,-46.395 133.715,-42.52 119.715,-41.42 104.465,-41.47 104.24,-55.395 94.09,-55.37 85.79,-55.72 78.14,-57.02 68.09,-60.12 58.59,-64.645 49.09,-70.37 49.19,-70.92 35.69,-84.02 19.665,-67.87 31.049,-56.624 31.074,32.351 42.715,32.305 42.74,24.955 51.39,24.93 51.39,32.305 97.94,32.455 97.965,36.23 120.515,36.23
VCC on Bottom Layer "F.Cu-" (solid, remove dead copper, pour order 12): -81.62,32.48 -122.47,32.605 -122.495,10.33 -127.17,9.53 -124.645,-4.37 -143.145,-7.67 -135.745,-48.945 -117.32,-45.47 -116.42,-50.495 -94.095,-46.395 -94.795,-42.52 -80.795,-41.42 -65.545,-41.47 -65.32,-55.395 -55.17,-55.37 -46.87,-55.72 -39.22,-57.02 -29.17,-60.12 -19.67,-64.645 -10.17,-70.37 -10.27,-70.92 3.23,-84.02 19.255,-67.87 7.972,-56.723 7.947,32.352 -3.795,32.305 -3.82,24.955 -12.47,24.93 -12.47,32.305 -59.02,32.455 -59.045,36.23 -81.595,36.23
VCC_L on Bottom Layer "F.Cu-" (solid, remove dead copper, pour order 13): 120.54,32.48 161.39,32.605 161.415,10.33 166.09,9.53 163.565,-4.37 182.065,-7.67 174.665,-48.945 156.24,-45.47 155.34,-50.495 133.015,-46.395 133.715,-42.52 119.715,-41.42 104.465,-41.47 104.24,-55.395 94.09,-55.37 85.79,-55.72 78.14,-57.02 68.09,-60.12 58.59,-64.645 49.09,-70.37 49.19,-70.92 35.69,-84.02 19.665,-67.87 30.948,-56.723 30.973,32.352 42.715,32.305 42.74,24.955 51.39,24.93 51.39,32.305 97.94,32.455 97.965,36.23 120.515,36.23

## Silkscreen, mask and mechanical layers (free items; w line width, h text height)
Top Overlay:
  drawing of 23 lines, arcs and shapes, not listed
  text "BATT+--" at -18.219,27.909 h0.6
  text "--LED" at 1.583,27.72 h0.6
  text "--LED" at 55.983,26.62 h0.6
  text "BATT+--" at 38.481,26.609 h0.6
  text "GND--" at -17.844,25.366 h0.6
  text "--TX" at 1.583,25.18 h0.6
  text "--TX" at 55.983,24.08 h0.6
  text "GND--" at 38.856,24.066 h0.6
  text "RST--" at -17.686,22.826 h0.6
  text "--GND" at 1.583,22.636 h0.6
  text "RST--" at 39.014,21.526 h0.6
  text "--GND" at 55.983,21.536 h0.6
  text "VCC--" at -17.727,20.286 h0.6
  text "--GND" at 1.583,20.096 h0.6
  text "VCC--" at 38.973,18.986 h0.6
  text "--GND" at 55.983,18.996 h0.6
  text "ENC A--" at -18.105,17.746 h0.6
  text "--SDA" at 1.583,17.556 h0.6
  text "ENC A--" at 38.595,16.446 h0.6
  text "--SDA" at 55.983,16.456 h0.6
  text "ENC B--" at -18.12,15.206 h0.6
  text "--SCL" at 1.583,15.016 h0.6
  text "ENC B--" at 38.58,13.906 h0.6
  text "--SCL" at 55.983,13.916 h0.6
  text "COL0--" at -17.938,12.665 h0.6
  text "--RX" at 1.583,12.48 h0.6
  text "--RX" at 55.983,11.38 h0.6
  text "COL0--" at 38.762,11.365 h0.6
  text "COL1--" at -17.943,10.126 h0.6
  text "--ROW0" at 1.583,9.935 h0.6
  text "COL1--" at 38.757,8.826 h0.6
  text "--ROW0" at 55.983,8.835 h0.6
  text "COL2--" at -17.938,7.586 h0.6
  text "--ROW1" at 1.583,7.396 h0.6
  text "COL2--" at 38.762,6.286 h0.6
  text "--ROW1" at 55.983,6.296 h0.6
  text "MOUNT MCU ON BOTTOM / COMPONENTS FACING PCB" at -7.647,6.23 h0.8 r90
  text "MOUNT MCU ON BOTTOM / COMPONENTS FACING PCB" at 47.663,6.18 h0.8 r90
  text "TENTING / PUCK" at 95.689,5.532 h0.8
  text "COL3--" at -17.938,5.045 h0.6
  text "--ROW2" at 1.583,4.856 h0.6
  text "COL3--" at 38.762,3.745 h0.6
  text "--ROW2" at 55.983,3.756 h0.6
  text "COL4--" at -17.938,2.506 h0.6
  text "--ROW3" at 1.583,2.315 h0.6
  text "TENTING / PUCK" at -44.24,2.13 h0.8
  text "COL4--" at 38.762,1.206 h0.6
  text "--ROW3" at 55.983,1.215 h0.6
  text "COL5--" at -17.938,-0.035 h0.6
  text "--AUDIO" at 1.583,-0.224 h0.6
  text "COL5--" at 38.762,-1.335 h0.6
  text "--AUDIO" at 55.983,-1.324 h0.6
  text "OLED" at -20.448,-16.347 h0.8
  text "OLED" at 58.412,-16.347 h0.8
  text "RED" at 39.365,-18.486 h0.6
  text "BLK" at -7.637,-18.732 h0.6
  text "SDA" at 42.419,-19.211 h0.76
  text "SCL" at 44.922,-19.227 h0.76
  text "VCC" at 47.39,-19.227 h0.76
  text "GND" at 49.967,-19.227 h0.76
  text "GND" at -11.945,-19.288 h0.76
  text "SCL" at -6.844,-19.4 h0.76
  text "SDA" at -4.162,-19.4 h0.76
  text "RED" at -2.195,-21.786 h0.6
  text "BLK" at 39.365,-21.786 h0.6
  text "VCC" at -7.292,-21.85 h0.76
  text "BATT" at 0.777,-22.967 h0.8
  text "BATT" at 37.287,-22.967 h0.8
  text "BUZZER" at -66.993,-26.394 h0.8
  text "BATT" at 5.757,-28.642 h0.8
  text "BATT" at 32.307,-28.642 h0.8
  text "SDA" at -59.686,-31.157 h0.76
  text "SCL" at -57.082,-31.157 h0.76
  text "VCC" at -54.614,-31.157 h0.76
  text "GND" at -52.037,-31.157 h0.76
  text "SDA" at 87.799,-31.157 h0.76
  text "SCL" at 90.402,-31.157 h0.76
  text "VCC" at 92.871,-31.157 h0.76
  text "VCC" at 92.871,-31.157 h0.76
  text "GND" at 95.448,-31.157 h0.76
  text "GND" at 95.448,-31.157 h0.76
  text "TRACK / BALL" at 85.685,-33.571 h0.76
  text "ENC" at -12.263,-36.097 h0.8
  text "ENC" at 50.497,-36.097 h0.8
  text "BUZZER" at 104.39,-37.119 h0.8
Bottom Overlay:
  drawing of 11 lines, arcs and shapes, not listed
  text "MOUNT MCU ON BOTTOM / COMPONENTS FACING PCB" at 46.567,6.23 h0.8 r270
  text "MOUNT MCU ON BOTTOM / COMPONENTS FACING PCB" at -8.743,6.18 h0.8 r270
  text "TENTING / PUCK" at 97.19,5.357 h0.8
  text "TENTING / PUCK" at -42.64,2.23 h0.8
  text "OLED" at -19.492,-16.347 h0.8
  text "OLED" at 59.368,-16.347 h0.8
  text "BATT" at 1.633,-22.967 h0.8
  text "BATT" at 38.143,-22.967 h0.8
  text "BUZZER" at 105.913,-26.394 h0.8
  text "BATT" at 33.163,-28.642 h0.8
  text "ENC" at -11.577,-36.097 h0.8
  text "ENC" at 51.183,-36.097 h0.8
  text "BUZZER" at -65.47,-37.119 h0.8
  text "RST" at 3.623,-38.272 h0.8
  text "TRACK / BALL" at 89.653,-38.68 h0.76
Top Solder:
  region: -68.226,-29.402 -68.223,-29.402 -68.227,-29.402
  region: 113.327,-29.406 113.326,-29.406 113.33,-29.406
Bottom Solder:
  region: 107.146,-29.402 107.143,-29.402 107.147,-29.402
Board Shape:
  drawing of 53973 lines, arcs and shapes, not listed
Mechanical 21:
  drawing of 680 lines, arcs and shapes, not listed

## Text inside footprints (layer, text, board x,y; h text height)
J1: Bottom Overlay "TRRS" at 2.581,-43.827 h0.8
J4: Bottom Overlay "TRRS" at 36.339,-43.113 h0.8 r180
OLED1: Bottom Overlay "GND" at -11.074,-8.282 h1 r90; Bottom Overlay "VCC" at -8.492,-8.282 h1 r90; Bottom Overlay "SCL" at -5.909,-8.282 h1 r90; Bottom Overlay "SDA" at -3.327,-8.282 h1 r90
OLED2: Bottom Overlay "SDA" at 50.841,-8.282 h1 r90; Bottom Overlay "SCL" at 48.259,-8.282 h1 r90; Bottom Overlay "VCC" at 45.676,-8.282 h1 r90; Bottom Overlay "GND" at 43.094,-8.282 h1 r90